# Altium PCB H_Bridge_DFN856.PcbDoc
Units mm, origin at the board's own origin, x right, y up, seen from the top; angles counter-clockwise.
Board outline 26.97 x 29.76 mm, 2 copper layers (Top Layer, Bottom Layer); 27 components, 16 nets, 112 pads, 19 vias.
Unrouted connection lines stored in the file: 2.
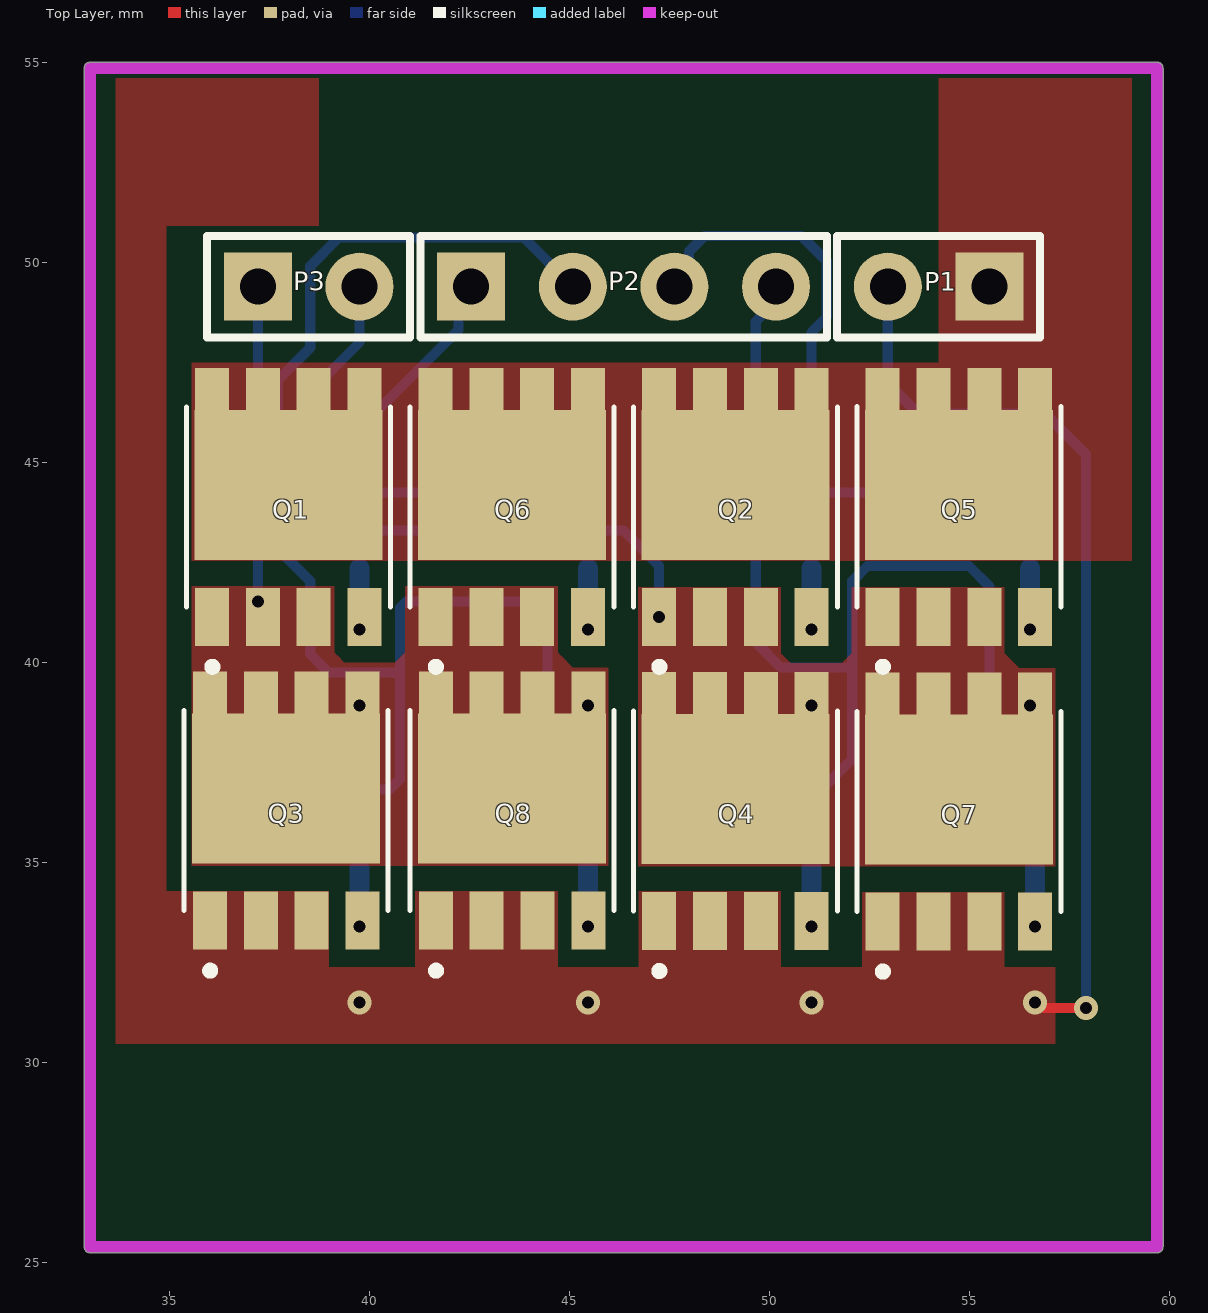
[diagram p0: Top Layer view]
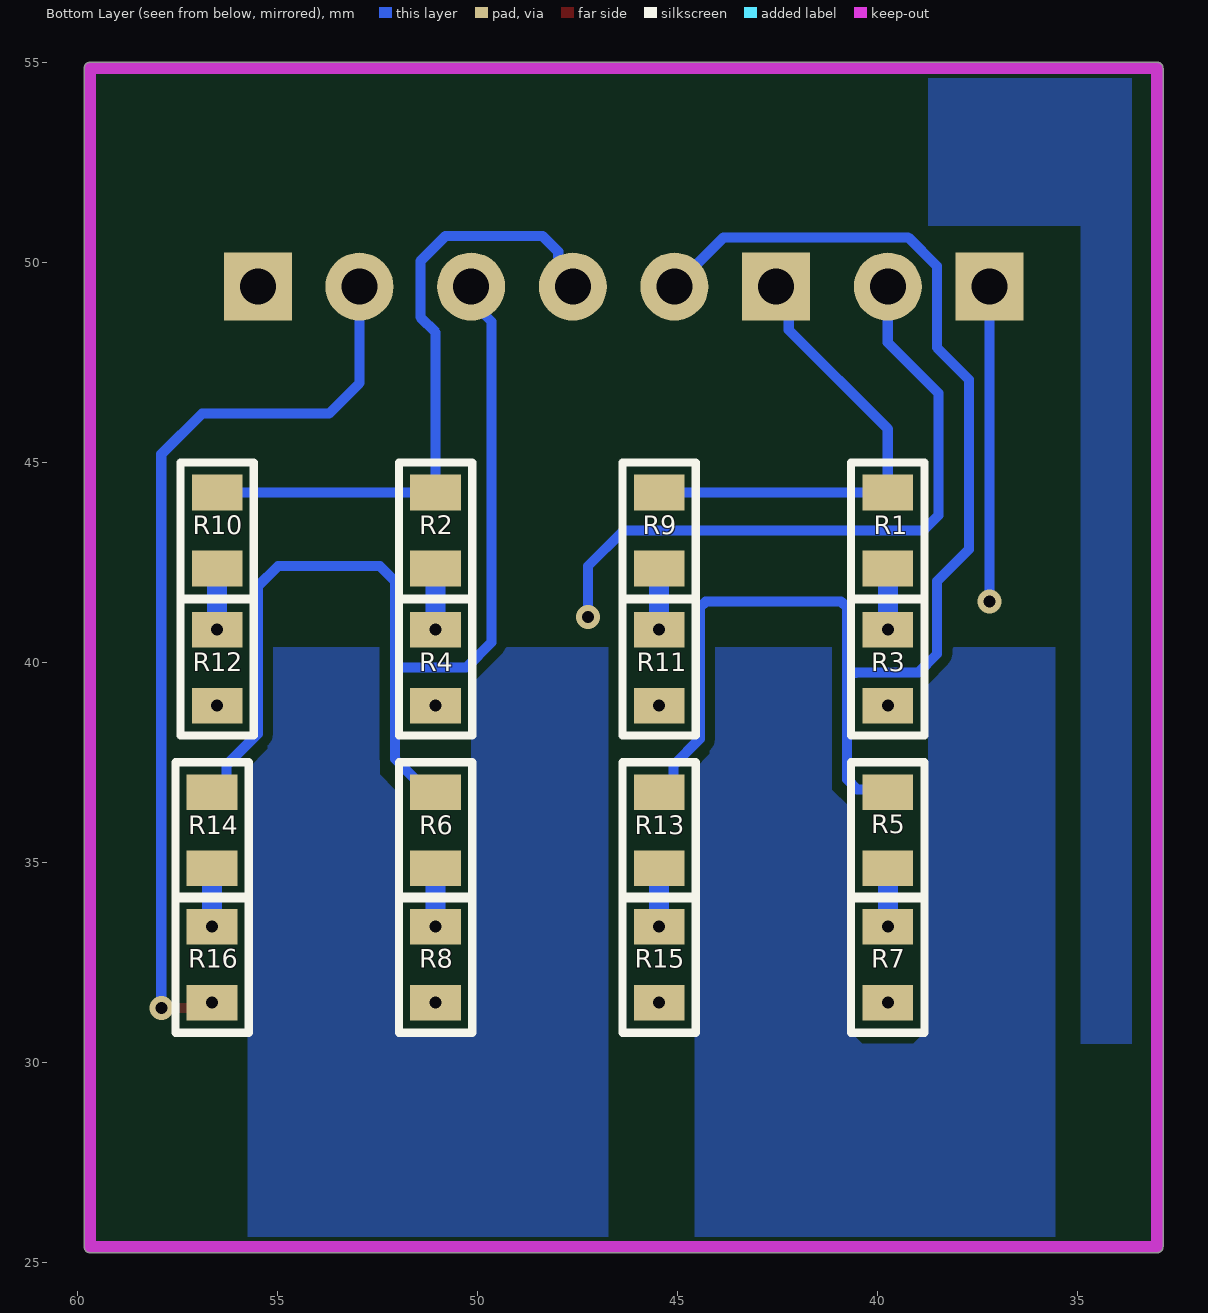
[diagram p1: Bottom Layer view, seen from below]

## Layer stack, top to bottom
Top Solder: solder mask 0.0102, Solder Resist, Dk 3.5
Top Layer: signal copper 0.0356
Dielectric 1: dielectric 0.32, FR-4, Dk 4.8
Bottom Layer: signal copper 0.0356
Bottom Solder: solder mask 0.0102, Solder Resist, Dk 3.5

## Board outline
32.87,25.4 ccw(c33.02,25.4) 33.02,25.25 59.69,25.25 ccw(c59.69,25.4) 59.84,25.4 59.84,54.864 ccw(c59.69,54.864) 59.69,55.014 33.02,55.014 ccw(c33.02,54.864) 32.87,54.864

## Design rules (kind name [scope] priority, off if disabled: settings)
Clearance [All] p1: gap=0.254 ignorepadtopadclearanceinfootprint=FALSE except(0: Arc-Hole Track-Hole SMDPad-Hole THPad-Hole Via-Hole Fill-Hole Poly-Hole Region-Hole Text-Hole)
PolygonConnect [All] p1: connectstyle=Direct reliefconductorwidth=0.254 reliefentries=4 polygonreliefangle="90 Angle" airgapwidth=0.254
RoutingVias [All] p1: holewidth=0.3 width=0.6 viastyle="Through Hole" minholewidth=0.3 minwidth=0.6 maxholewidth=0.711 maxwidth=1.27
SolderMaskExpansion [All] p1: expansion=0.102 istentingtop=FALSE
Width [All] p1: maxlimit=10 minlimit=0.254 preferedwidth=0.254
30 further rules are at their usual default settings.

## Components (designator, comment, footprint, x,y, rotation, side; value= is the part's Value field where it differs from the comment)
P1 "Header 2" HDR2.54-LI-2P 54.229,49.403 r180 top
P2 "Header 4" HDR2.54-LI-4P 46.355,49.403 r0 top
P3 "Header 2" HDR2.54-LI-2P 38.481,49.403 r0 top
Q1 "NMOS-8" PSOP8 37.973,43.898 r90 top
Q2 "NMOS-8" PSOP8 49.149,43.898 r90 top
Q3 "NMOS-8" PSOP8 37.919,36.301 r90 top
Q4 "NMOS-8" PSOP8 49.149,36.293 r90 top
Q5 "NMOS-8" PSOP8 54.737,43.9 r90 top
Q6 "NMOS-8" PSOP8 43.561,43.898 r90 top
Q7 "NMOS-8" PSOP8 54.737,36.28 r90 top
Q8 "NMOS-8" PSOP8 43.567,36.301 r90 top
R1 "0805" "R 0805_L" 39.751,43.307 r270 bottom value=1.8R
R2 "0805" "R 0805_L" 51.054,43.307 r270 bottom value=1.8R
R3 "0805" "R 0805_L" 39.751,39.878 r270 bottom value=10K
R4 "0805" "R 0805_L" 51.054,39.878 r270 bottom value=10K
R5 "0805" "R 0805_L" 39.751,35.814 r270 bottom value=1.8R
R6 "0805" "R 0805_L" 51.054,35.814 r270 bottom value=1.8R
R7 "0805" "R 0805_L" 39.751,32.451 r270 bottom value=10K
R8 "0805" "R 0805_L" 51.054,32.451 r270 bottom value=10K
R9 "0805" "R 0805_L" 45.466,43.307 r270 bottom value=1.8R
R10 "0805" "R 0805_L" 56.515,43.307 r270 bottom value=1.8R
R11 "0805" "R 0805_L" 45.466,39.878 r270 bottom value=10K
R12 "0805" "R 0805_L" 56.515,39.878 r270 bottom value=10K
R13 "0805" "R 0805_L" 45.466,35.814 r270 bottom value=1.8R
R14 "0805" "R 0805_L" 56.642,35.814 r270 bottom value=1.8R
R15 "0805" "R 0805_L" 45.466,32.451 r270 bottom value=10K
R16 "0805" "R 0805_L" 56.642,32.451 r270 bottom value=10K

## Footprints (in the part's own frame and the unit in brackets; to place one, negate y for a bottom-side part, rotate by r counter-clockwise, add the part's x,y. Pads: shape width x height; smd on the part's side, far side on the other; paste and mask are expansions set on the pad)
HDR2.54-LI-2P [mm] "排针，2脚"
  rect 1.7x1.7 hole 0.9: 1(-1.27,0)
  round 1.7 hole 0.9: 2(1.27,0)
  silkscreen extent -2.54,-1.27 2.54,1.27, body extent -2.54,-1.27 2.54,1.27, height 8.5
HDR2.54-LI-4P [mm] "排针，4脚"
  rect 1.7x1.7 hole 0.9: 1(-3.81,0)
  round 1.7 hole 0.9: 2(-1.27,0) 3(1.27,0) 4(3.81,0)
  silkscreen extent -5.08,-1.27 5.08,1.27, body extent -5.08,-1.27 5.08,1.27, height 8.5
PSOP8 [mm]
  rect 1.45x0.85 smd: 1(-2.75,1.905) 2(-2.75,0.635) 3(-2.75,-0.635) 4(-2.75,-1.905)
  rect 1.05x0.85 smd: 5(2.95,-1.905) 6(2.95,-0.635) 7(2.95,0.635) 8(2.95,1.905)
  rect 3.75x4.7 smd: 9(0.55,0)
  silkscreen extent -4.1,-2.55 2.5,2.55, body extent -3.05,-2.54 3.05,2.54, height 0.65
"R 0805_L" [mil] "1/8W贴片电阻"
  rect 35x50 smd: 1(-37.4,0) 2(37.4,0)
  silkscreen extent -67,-36 67,36, body extent -39,-25 39,25, height 20

## Part data
P1 P3: "Header, 2-Pin", LatestRevisionDate=17-Jul-2002, LatestRevisionNote="Re-released for DXP Platform.", Publisher="Altium Limited"
P2: "Header, 4-Pin", LatestRevisionDate=17-Jul-2002, LatestRevisionNote="Re-released for DXP Platform.", Publisher="Altium Limited"
R1 R2 R3 R4 R5 R6 R7 R8 R9 R10 R11 R12 R13 R14 R15 R16: library part RES2, "Resistor", LatestRevisionDate=17-Jul-2002, LatestRevisionNote="Re-released for DXP Platform.", PackageDescription="Axial Device, Thru-Hole; 2 Leads; 0.3 in Pin Spacing", PackageReference=AXIAL-0.3, Published=8-Jun-2000, Publisher="Altium Limited"

## Via types
v1: diameter 0.6, hole 0.3, Top Layer to Bottom Layer, 19 vias

## Nets (pads, with @x,y where several pads share a name; then routed paths per layer and width w, separated by ;. In a path a pad name is that pad's centre, name@x,y a point inside that pad or via, vN(x,y) a via of type N, cw(c..) or ccw(c..) an arc to the next point about the centre after c; other vN are vias at no path point)
AH: P2.1 R1.1 R9.1 | length 12
  Bottom Layer w0.254: P2.1 42.225,49.083 42.225,48.321 39.751,45.847 R1.1 R9.1
AL: P2.2 R5.1 R13.1 | length 34.5
  Bottom Layer w0.254: R5.1 39.817,36.83 40.513,36.83 40.767,37.084 40.767,39.751 ; P2.2 43.854,50.634 39.241,50.634 38.52,49.913 38.52,47.879 37.719,47.078 37.719,42.838 38.52,42.037 38.52,40.22 38.986,39.754 40.544,39.754 40.547,39.751 40.767,39.751 ; R13.1 45.427,36.764 45.109,37.082 45.109,37.441 44.45,38.1 44.45,41.38 44.301,41.529 40.916,41.529 40.767,41.38 40.767,39.751
AO: P3.1 Q1.1 Q1.2 Q1.3 Q3.5 Q3.6 Q3.7 Q3.8 Q3.9 Q6.1 Q6.2 Q6.3 Q8.5 Q8.6 Q8.7 Q8.8 Q8.9 R3.2 R11.2 | length 7.9
  Bottom Layer w0.254: v1(37.211,41.529) P3.1
  other v1: 39.751,38.928 45.466,38.928
BH: P2.3 R2.1 R10.1 | length 16.3
  Bottom Layer w0.254: P2.3 47.625,49.794 47.987,50.157 47.987,50.273 48.387,50.673 50.8,50.673 51.435,50.038 51.435,48.641 51.054,48.26 R2.1 R10.1
BL: P2.4 R6.1 R14.1 | length 27
  Bottom Layer w0.254: P2.4 50.165,49.039 49.657,48.531 49.657,40.513 50.292,39.878 52.07,39.878 ; R6.1 51.244,36.764 51.562,37.082 51.562,37.084 52.07,37.592 52.07,39.878 ; R14.1 56.603,36.764 56.285,37.082 56.285,37.441 55.499,38.227 55.499,41.91 54.991,42.418 52.451,42.418 52.07,42.037 52.07,41.755 52.07,39.878
BO: P3.2 Q2.1 Q2.2 Q2.3 Q4.5 Q4.6 Q4.7 Q4.8 Q4.9 Q5.1 Q5.2 Q5.3 Q7.5 Q7.6 Q7.7 Q7.8 Q7.9 R4.2 R12.2 | length 16.8
  Bottom Layer w0.254: P3.2 39.751,48.006 38.481,46.736 38.481,43.688 38.862,43.307 46.355,43.307 47.244,42.418 v1(47.244,41.148)
  other v1: 51.054,38.928 56.515,38.928
GND: P1.2 Q3.1 Q3.2 Q3.3 Q4.1 Q4.2 Q4.3 Q7.1 Q7.2 Q7.3 Q8.1 Q8.2 Q8.3 R7.2 R8.2 R15.2 R16.2 | length 23.3
  Top Layer w0.254: v1(56.642,31.501) 56.736,31.501 56.868,31.369 v1(57.912,31.369)
  Bottom Layer w0.254: P1.2 52.959,46.99 53.721,46.228 56.896,46.228 57.912,45.212 v1(57.912,31.369)
  other v1: 39.751,31.501 45.466,31.501 51.054,31.501
NetQ1_4: Q1.4 R1.2 R3.1 | length 1.5
  Bottom Layer w0.5: v1(39.751,40.828) R1.2
NetQ2_4: Q2.4 R2.2 R4.1 | length 1.5
  Bottom Layer w0.5: v1(51.054,40.828) R2.2
NetQ3_4: Q3.4 R5.2 R7.1 | length 1.5
  Bottom Layer w0.5: v1(39.751,33.401) R5.2
NetQ4_4: Q4.4 R6.2 R8.1 | length 1.5
  Bottom Layer w0.5: v1(51.054,33.401) R6.2
NetQ5_4: Q5.4 R10.2 R12.1 | length 1.5
  Bottom Layer w0.5: v1(56.515,40.828) R10.2
NetQ6_4: Q6.4 R9.2 R11.1 | length 1.5
  Bottom Layer w0.5: v1(45.466,40.828) R9.2
NetQ7_4: Q7.4 R14.2 R16.1 | length 1.5
  Bottom Layer w0.5: v1(56.642,33.401) R14.2
NetQ8_4: Q8.4 R13.2 R15.1 | length 1.5
  Bottom Layer w0.5: v1(45.466,33.401) R13.2
VCC: P1.1 Q1.5 Q1.6 Q1.7 Q1.8 Q1.9 Q2.5 Q2.6 Q2.7 Q2.8 Q2.9 Q5.5 Q5.6 Q5.7 Q5.8 Q5.9 Q6.5 Q6.6 Q6.7 Q6.8 Q6.9

## Polygon pours and split planes (outlines as drawn)
GND on Top Layer "NONET_L01_P-001" (solid, pour order 19): 35.56,34.29 34.925,34.29 34.925,50.927 38.735,50.927 38.735,54.61 33.655,54.61 33.655,30.48 35.56,30.48
VCC on Top Layer "NONET_L01_P-001" (solid, pour order 18): 54.229,54.61 59.055,54.61 59.055,42.545 54.229,42.545
GND on Top Layer "NONET_L01_P-001" (solid, pour order 14): 52.318,34.269 52.318,32.364 55.874,32.364 55.874,34.269
GND on Top Layer "NONET_L01_P-001" (solid, pour order 13): 46.73,34.282 46.73,32.377 50.286,32.377 50.286,34.282
GND on Top Layer "NONET_L01_P-001" (solid, pour order 12): 41.148,34.29 41.148,32.385 44.704,32.385 44.704,34.29
GND on Top Layer "NONET_L01_P-001" (solid, pour order 11): 35.56,34.29 35.56,32.385 38.989,32.385 38.989,34.29
GND on Top Layer "NONET_L01_P-001" (solid, pour order 10): 57.15,32.385 35.56,32.385 35.56,30.48 57.15,30.48
VCC on Top Layer "NONET_L01_P-001" (solid, pour order 4): 35.56,47.498 35.56,42.545 57.15,42.545 57.15,47.498
BO on Top Layer "NONET_L01_P-001" (solid, pour order 3): 46.726,41.894 50.282,41.894 50.282,40.243 50.536,39.989 51.806,39.989 52.06,40.243 52.06,41.894 55.87,41.894 55.87,40.243 56.251,39.862 57.14,39.862 57.14,34.909 46.726,34.909
AO on Top Layer "NONET_L01_P-001" (solid, pour order 2): 35.56,41.91 39.116,41.91 39.116,40.259 39.37,40.005 40.64,40.005 40.894,40.259 40.894,41.91 44.704,41.91 44.704,40.259 45.085,39.878 45.974,39.878 45.974,34.925 35.56,34.925
GND on Bottom Layer "NONET_L01_P-001" (solid, pour order 20): 34.925,30.48 34.925,50.927 38.735,50.927 38.735,54.61 33.655,54.61 33.655,30.48
no net on Bottom Layer "NONET_L01_P-001" (solid, pour order 17): 46.736,40.386 49.276,40.386 50.165,39.497 50.165,30.988 50.419,30.734 51.816,30.734 52.07,30.988 52.07,36.83 52.451,37.211 52.451,40.386 55.245,40.386 55.245,37.846 55.753,37.338 55.753,25.654 46.736,25.654
no net on Bottom Layer "NONET_L01_P-001" (solid, pour order 16): 46.736,40.64
AO on Bottom Layer "NONET_L01_P-001" (solid, pour order 15): 35.56,40.386 38.1,40.386 38.735,39.751 38.735,30.861 39.116,30.48 40.386,30.48 40.767,30.861 40.767,36.449 41.148,36.83 41.148,40.386 44.196,40.386 44.196,37.719 44.577,37.338 44.577,25.654 35.56,25.654

## Keep-outs
Keep-Out Layer:
  lines w0.3: 33.02,25.4 59.69,25.4 59.69,54.864 33.02,54.864 33.02,25.4